# Altium PCB PCB1.PcbDoc
Units mil, origin at the board's own origin, x right, y up, seen from the top; angles counter-clockwise.
Board outline 4350 x 3850 mil, 2 copper layers (Top Layer, Bottom Layer); 44 components, 40 nets, 165 pads, 38 vias.
Unrouted connection lines stored in the file: 56.
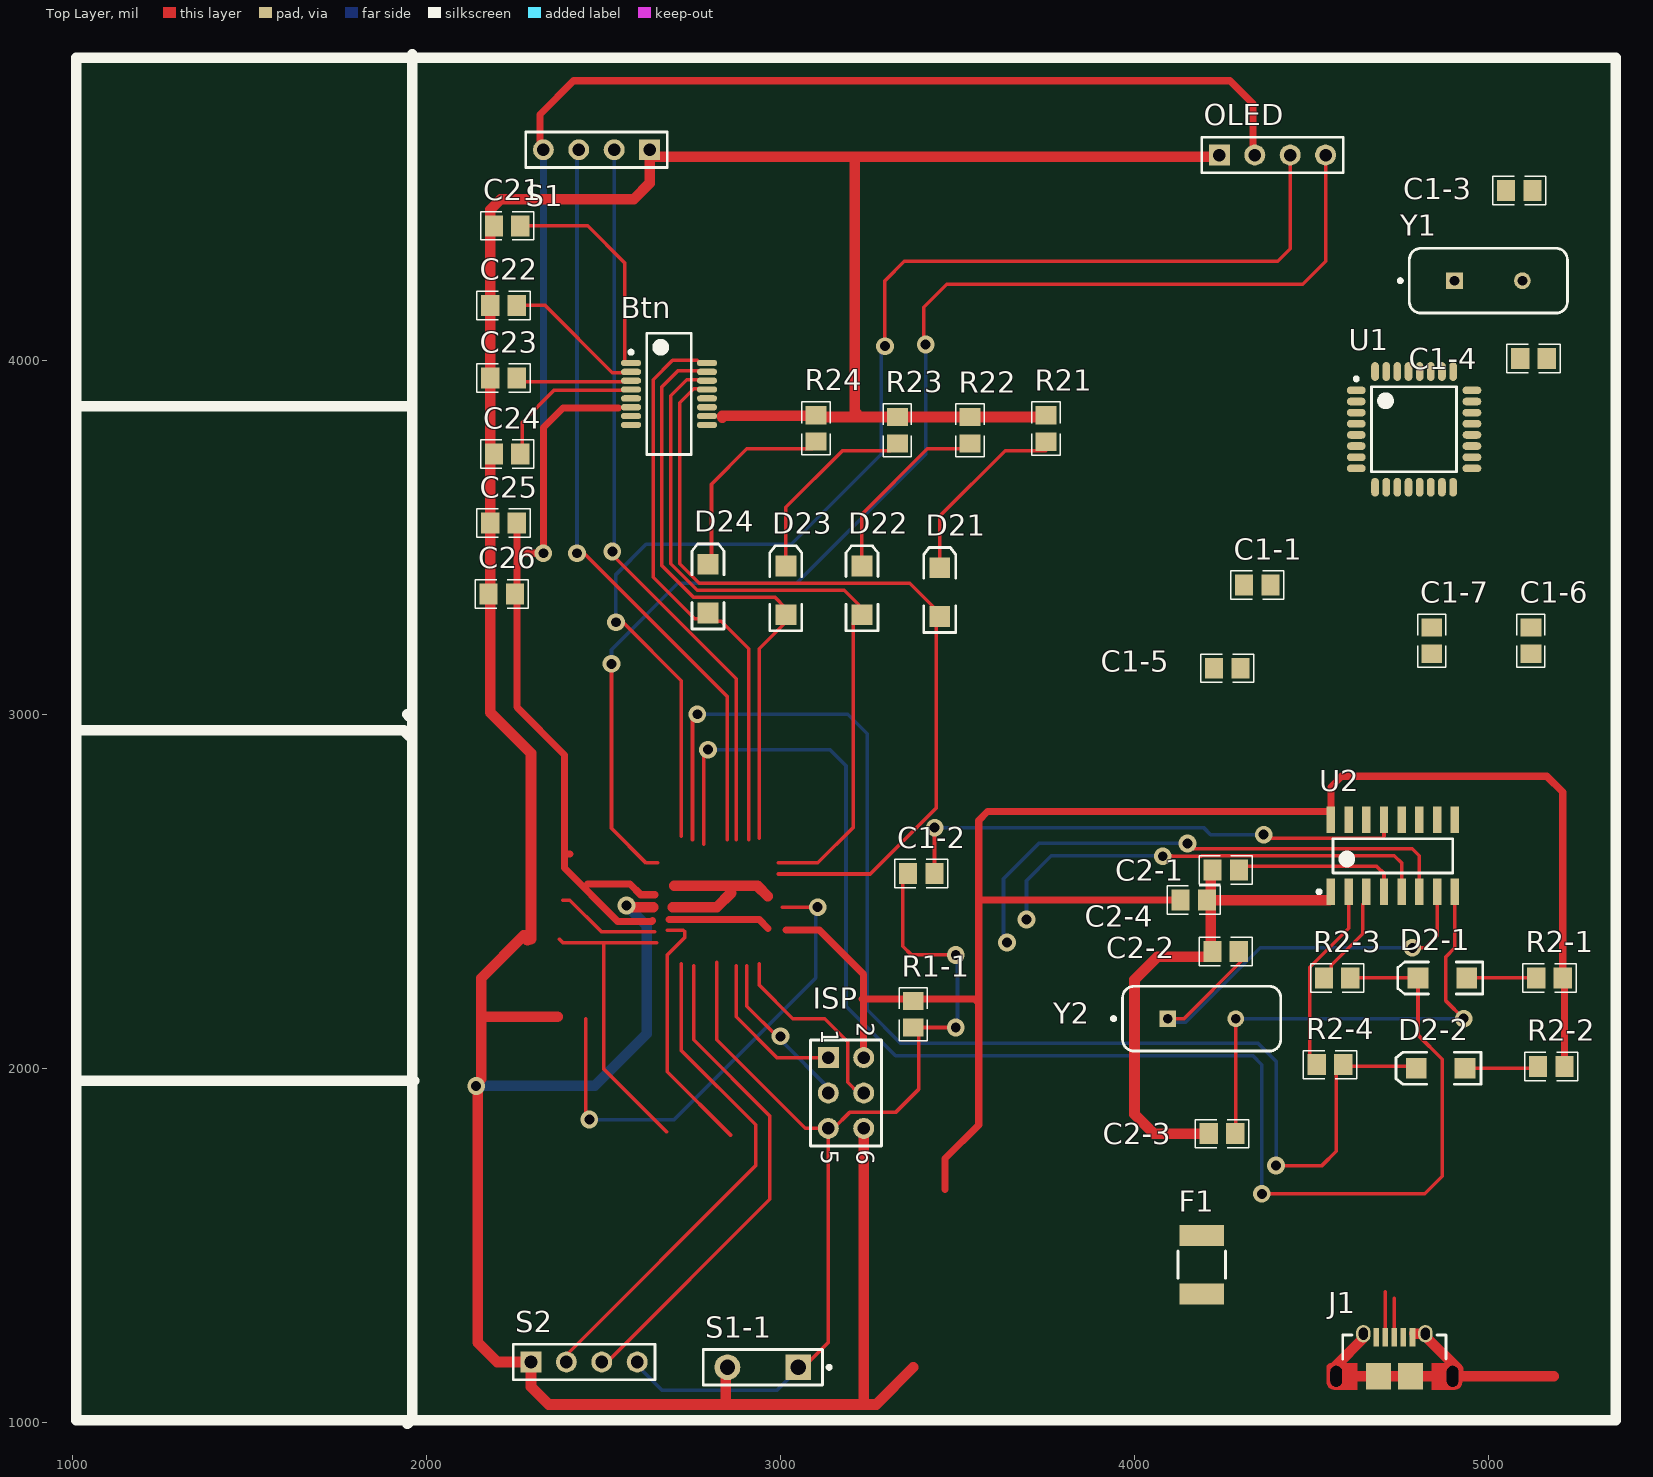
[diagram p0: Top Layer view]
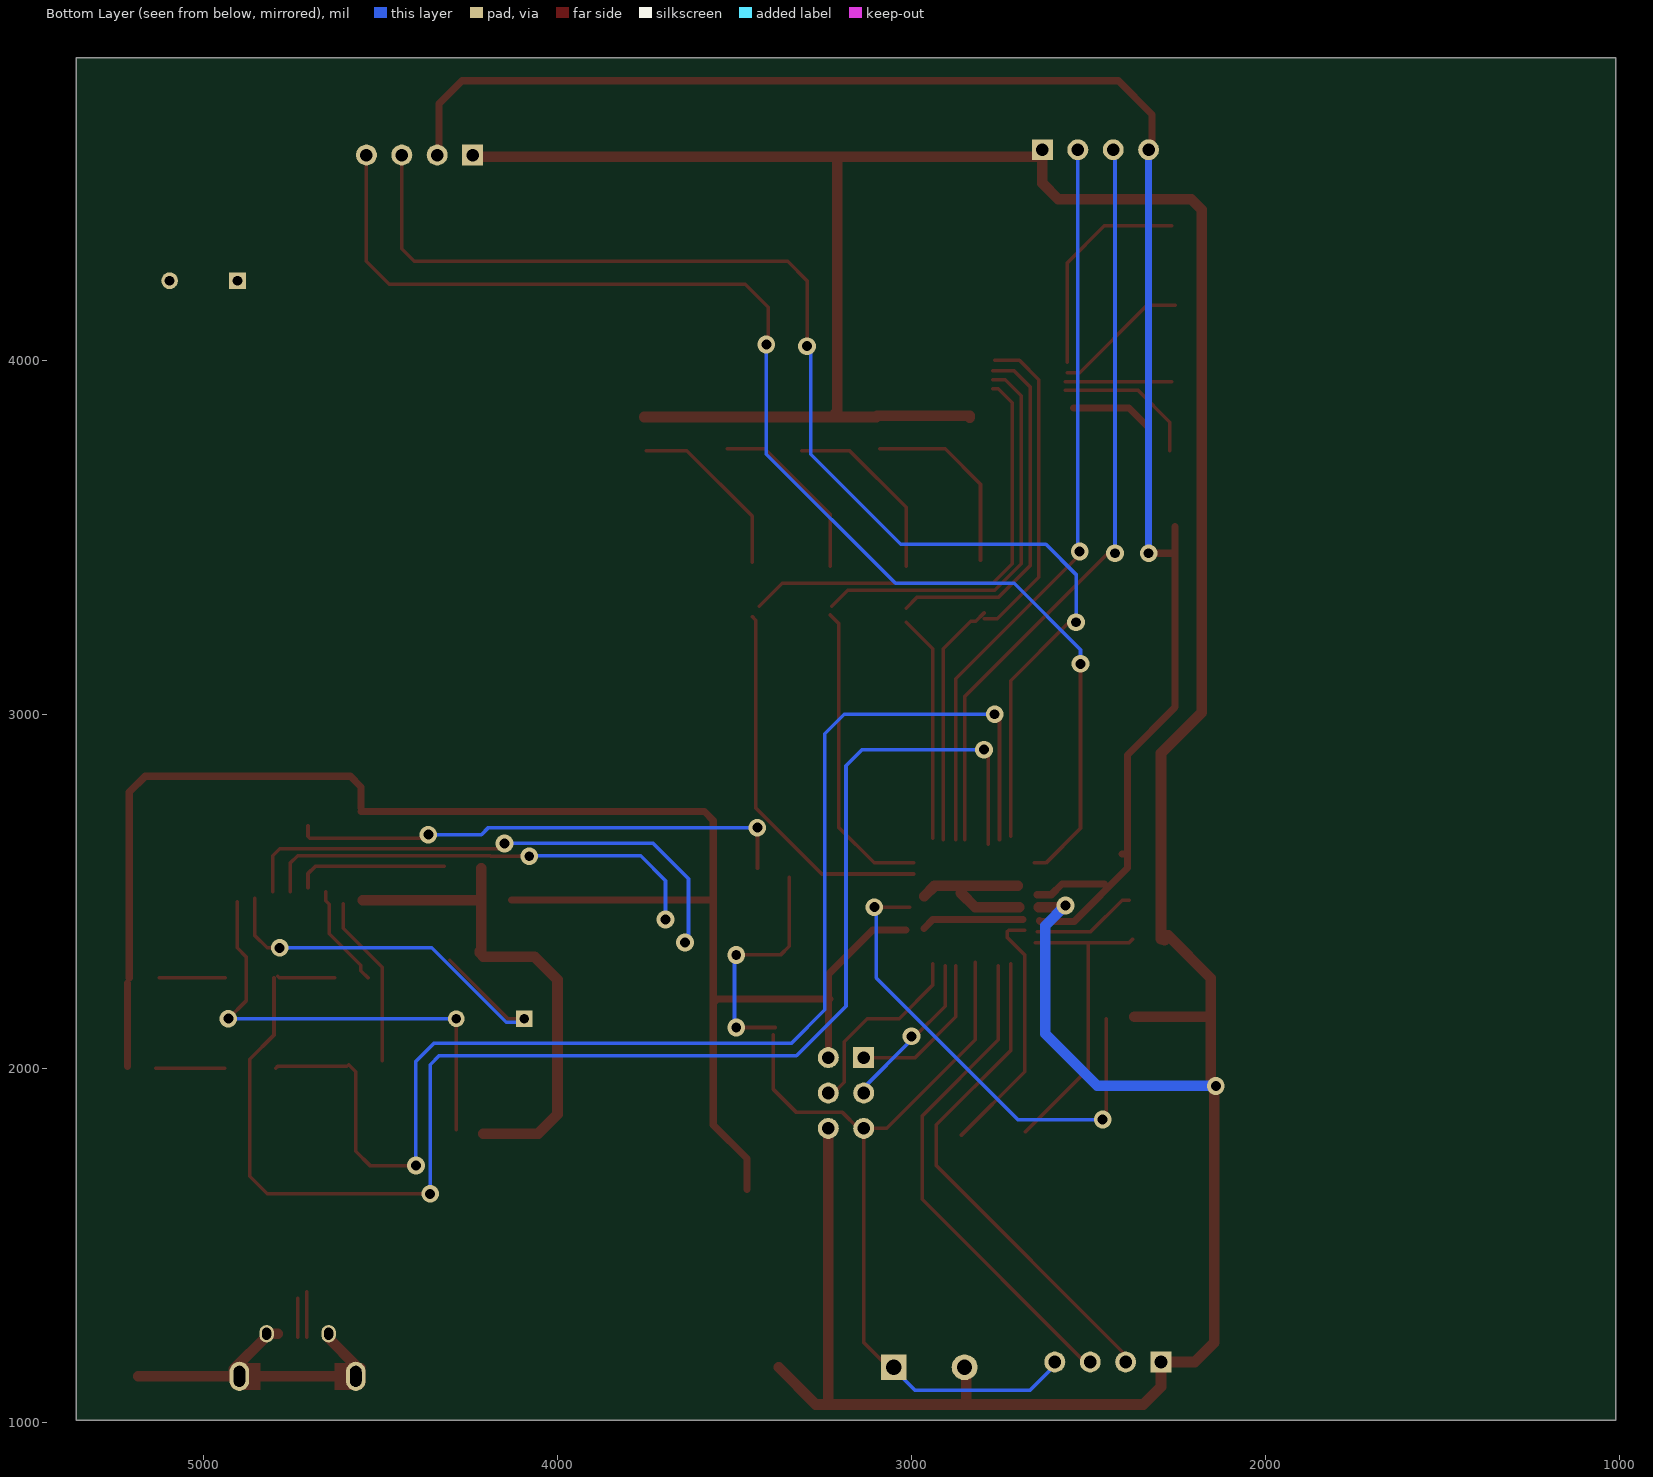
[diagram p1: Bottom Layer view, seen from below]

## Layer stack, top to bottom
Top Solder: solder mask 0.4, Solder Resist, Dk 3.5
Top Layer: signal copper 1.4
Dielectric 1: dielectric 12.6, FR-4, Dk 4.8
Bottom Layer: signal copper 1.4
Bottom Solder: solder mask 0.4, Solder Resist, Dk 3.5

## Board outline
1010,1005 1010,4855 5360,4855 5360,1005

## Design rules (kind name [scope] priority, off if disabled: settings)
Clearance [All] p1: gap=6 ignorepadtopadclearanceinfootprint=TRUE
PolygonConnect [All] p1: connectstyle=Relief reliefconductorwidth=10 reliefentries=4 polygonreliefangle="90 Angle" airgapwidth=10
RoutingVias [All] p1: holewidth=28 width=50 viastyle="Through Hole" minholewidth=28 minwidth=50 maxholewidth=28 maxwidth=50
SolderMaskExpansion [All] p1: expansion=4 istentingtop=FALSE
Width [All] p1: maxlimit=30 minlimit=10 preferedwidth=15
30 further rules are at their usual default settings.

## Classes and differential pairs
component class TTP224: Btn C21 C22 C23 C24 C25 C26 D21 D22 D23 D24 R21 R22 R23 R24
component class Sheet1: C1-1 C1-2 C1-3 C1-4 C1-5 C1-6 C1-7 C2-1 C2-2 C2-3 C2-4 D2-1 D2-2 F1 ISP J1 OLED R1-1 R2-1 R2-2 R2-3 R2-4 S1 S1-1 S2 U1 U2 Y1 Y2

## Components (designator, comment, footprint, x,y, rotation, side; value= is the part's Value field where it differs from the comment)
Btn "Btn" SOP64P600X175-16N 2685,3905 r0 top
C1-1 "CAP" 0805 3674.09,4169.84 r0 top value=22pF
C1-2 "CAP" 0805 4070.71,1745.16 r180 top value=22pF
C1-3 "CAP" 0805 5760.71,3675.16 r180 top value=22pF
C1-4 "CAP" 0805 5800.71,3200.16 r180 top value=22pF
C1-5 "CAP" 0805 3589.09,3934.84 r0 top value=22pF
C1-6 "CAP" 0805 4315,2535 r90 top value=22pF
C1-7 "CAP" 0805 4035,2535 r90 top value=22pF
C2-1 "CAP" 0805 3584.29,3364.84 r0 top value=22pF
C2-2 "CAP" 0805 3584.09,3134.84 r0 top value=22pF
C2-3 "CAP" 0805 3574.09,2619.84 r0 top value=22pF
C2-4 "CAP" 0805 3494.29,3279.84 r0 top value=0.1uF
C21 "CAP" 0805 1554.09,5184.84 r0 top value=30pF
C22 "CAP" 0805 1544.09,4959.84 r0 top value=30pF
C23 "CAP" 0805 1544.09,4754.84 r0 top value=30pF
C24 "CAP" 0805 1554.09,4539.84 r0 top value=30pF
C25 "CAP" 0805 1544.09,4344.84 r0 top value=30pF
C26 "CAP" 0805 1539.29,4144.84 r0 top value=30pF
D2-1 "LED2" 3.2X1.6X1.1 4870,2255 r180 top
D2-2 "LED2" 3.2X1.6X1.1 4865,2000 r180 top
D21 "LED2" 3.2X1.6X1.1 3450,3345 r90 top
D22 "LED2" 3.2X1.6X1.1 3230,3350 r90 top
D23 "LED2" 3.2X1.6X1.1 3015,3350 r90 top
D24 "LED2" 3.2X1.6X1.1 2795,3355 r90 top
F1 "MF-MSMF020-2" FP-MF-MSMF020-2-MFG 4190,1445 r270 top value=0.4-6Ω
ISP "Header 3X2" HDR2X3 3135,2030 r270 top
J1 "614105150621" 629105150921 4734.41,1129.57 r0 top
OLED "Header 4" HDR1X4 4240,4580 r0 top
R1-1 "RES" 0805 2570.16,1479.09 r90 top
R2-1 "RES" 0805 5845.91,1450.16 r180 top
R2-2 "RES" 0805 5850.71,1200.16 r180 top
R2-3 "RES" 0805 5245.71,1450.16 r180 top
R2-4 "RES" 0805 5225.71,1205.16 r180 top
R21 "RES" 0805 2945.16,3134.09 r90 top
R22 "RES" 0805 2730.16,3129.09 r90 top
R23 "RES" 0805 2525.16,3129.29 r90 top
R24 "RES" 0805 2295.16,3134.29 r90 top
S1 "Header 4" HDR1X4 2630,4595 r180 top
S1-1 "SW-PB" SPST-2 2950,1155 r180 top
S2 "Header 4" HDR1X4 2295,1170 r0 top
U1 "ATmega328P-AU" "32A_L - duplicate" 4790,3805 r0 top
U2 "CH340G" SOIC127P600X170-16N 4730,2600 r90 top
Y1 "FOXSLF/160-20" FOX-FOXSLF160-20 5000,4225 r0 top
Y2 "FOXSLF/160-20" FOX-FOXSLF160-20 4190,2140 r0 top

## Footprints (in the part's own frame and the unit in brackets; to place one, negate y for a bottom-side part, rotate by r counter-clockwise, add the part's x,y. Pads: shape width x height; smd on the part's side, far side on the other; paste and mask are expansions set on the pad)
3.2X1.6X1.1 [mm] "SMT LED; 2 Flat Leads"
  rect 1.5x1.5 smd: 1(-1.75,0) 2(1.75,0)
  silkscreen extent -2.9,-1.15 3.2,1.15
"32A_L - duplicate" [mm] "Thin QFP, 32-Leads, Body 7x7mm, Pitch 0.8mm, IPC High Density"
  oval 1.35x0.55 smd: 1(-4.15,2.8) 2(-4.15,2) 3(-4.15,1.2) 4(-4.15,0.4) 5(-4.15,-0.4) 6(-4.15,-1.2) 7(-4.15,-2) 8(-4.15,-2.8) 17(4.15,-2.8) 18(4.15,-2) 19(4.15,-1.2) 20(4.15,-0.4) 21(4.15,0.4) 22(4.15,1.2) 23(4.15,2) 24(4.15,2.8)
  oval 0.55x1.35 smd: 9(-2.8,-4.15) 10(-2,-4.15) 11(-1.2,-4.15) 12(-0.4,-4.15) 13(0.4,-4.15) 14(1.2,-4.15) 15(2,-4.15) 16(2.8,-4.15) 25(2.8,4.15) 26(2,4.15) 27(1.2,4.15) 28(0.4,4.15) 29(-0.4,4.15) 30(-1.2,4.15) 31(-2,4.15) 32(-2.8,4.15)
  silkscreen extent -4.27,-3.05 3.05,3.75, body extent -3.5,-3.5 3.5,3.5, height 1.2
0805 [mm]
  rect 1.3x1.5 smd: 1(16.152,-20.443) 2(18.052,-20.443)
  silkscreen extent 15.2,-21.46 19.01,-19.43, body extent 15.96,-20.95 18.25,-19.93, height 1
629105150921 [mm] "Micro USB 2.0 Type AB Horizontal"
  rect 0.4x1.35 smd: 1(-1.3,2.805) 2(-0.65,2.805) 3(0,2.805) 4(0.65,2.805) 5(1.3,2.805)
  round 0 / inner oval 1.4x2.1 / far side oval 1.4x2.1 hole 0.825 slot 1.5 at 90 deg mask+0.102: Shell(-4.175,0)
  oval 1.05x1.25 hole 0.65 slot 0.85 at 90 deg: Shell(-2.225,3.055) Shell(2.225,3.055)
  rect 1.8x1.9 smd: Shell(-1.15,0) Shell(1.15,0)
  round 0 / inner round 0 / far side oval 1.4x2.1 hole 0.825 slot 1.5 at 90 deg mask+0.102: Shell(4.175,0)
  Top Layer region: -4.353,-0.95 -4.544,-0.912 -4.706,-0.804 -4.814,-0.641 -4.852,-0.45 -4.852,-0.45 -4.852,0.65 -4.83,0.765 -4.765,0.862 -4.667,0.927 -4.553,0.95 -4.553,0.95 -2.668,0.95 -2.668,-0.95
  Top Layer region: 4.353,-0.95 4.544,-0.912 4.706,-0.804 4.814,-0.641 4.852,-0.45 4.852,-0.45 4.852,0.65 4.83,0.765 4.765,0.862 4.667,0.927 4.553,0.95 4.553,0.95 2.668,0.95 2.668,-0.95
  silkscreen extent -3.7,1.25 3.7,2.97, body extent -4.3,-2.64 4.3,3.23, height 2.76
FOX-FOXSLF160-20 [mm] "THD, 2-Leads, Body 11.35x4.65mm"
  rect 1.2x1.2 hole 0.7: 1(-2.44,0)
  round 1.2 hole 0.7: 2(2.44,0)
  silkscreen extent -6.45,-2.32 5.68,2.32, body extent -5.67,-2.32 5.68,2.33, height 3.6
FP-MF-MSMF020-2-MFG [mm]
  rect 1.5x3.2 smd paste+0 mask+0: 1(-2.1,0) 2(2.1,0)
  silkscreen extent -0.97,-1.71 0.97,1.71, body extent -2.95,-1.81 2.95,1.81, height 0.25
HDR1X4 [mm] "Connector; Header; 4 Position"
  rect 1.5x1.5 hole 0.9: 1(0,0)
  round 1.5 hole 0.9: 2(2.54,0) 3(5.08,0) 4(7.62,0)
  silkscreen extent -1.27,-1.27 8.89,1.27
HDR2X3 [mm] "Connector; Header; 3x2 Position"
  rect 1.5x1.5 hole 0.9: 1(0,0)
  round 1.5 hole 0.9: 2(0,2.54) 3(2.54,0) 4(2.54,2.54) 5(5.08,0) 6(5.08,2.54)
  silkscreen extent -1.27,-1.27 6.35,3.81
SOIC127P600X170-16N [mm] "SOIC, 16-Leads, Body 8.6x4.0mm (max), Pitch 1.27mm, IPC Medium Density"
  rect 1.9x0.6 smd: 1(-2.575,4.445) 2(-2.575,3.175) 3(-2.575,1.905) 4(-2.575,0.635) 5(-2.575,-0.635) 6(-2.575,-1.905) 7(-2.575,-3.175) 8(-2.575,-4.445) 9(2.575,-4.445) 10(2.575,-3.175) 11(2.575,-1.905) 12(2.575,-0.635) 13(2.575,0.635) 14(2.575,1.905) 15(2.575,3.175) 16(2.575,4.445)
  silkscreen extent -2.7,-4.3 1.22,5.42, body extent -1.98,-4.28 1.97,4.28, height 1.7
SOP64P600X175-16N [mm] "SOP, 16-Leads, Body 8.65x3.90mm, Pitch 0.64mm, IPC Medium Density"
  oval 1.45x0.45 smd: 1(-2.725,2.222) 2(-2.725,1.587) 3(-2.725,0.953) 4(-2.725,0.318) 5(-2.725,-0.318) 6(-2.725,-0.953) 7(-2.725,-1.587) 8(-2.725,-2.222) 9(2.725,-2.222) 10(2.725,-1.587) 11(2.725,-0.953) 12(2.725,-0.318) 13(2.725,0.318) 14(2.725,0.953) 15(2.725,1.587) 16(2.725,2.222)
  silkscreen extent -2.85,-4.35 1.6,4.35, body extent -2,-4.35 2,4.35, height 1.75
SPST-2 [mm] "Switch; 2 Leads"
  rect 1.85x1.85 hole 1.1: 1(-2.54,0)
  round 1.85 hole 1.1: 2(2.54,0)
  silkscreen extent -4.89,-1.27 4.28,1.27

## Part data
C1-1 C1-2 C1-3 C1-4 C1-5 C1-6 C1-7 C2-1 C2-2 C2-3 C2-4 C21 C22 C23 C24 C25 C26: "Capacitor"
D2-1 D2-2 D21 D22 D23 D24: "Typical RED, GREEN, YELLOW, AMBER GaAs LED", LatestRevisionDate=17-Jul-2002, LatestRevisionNote="Re-released for DXP Platform.", PackageDescription="SM LED; 2 Flat Leads", PackageReference=3.2X1.6X1.1, PackageVersion=Feb-2002, Published=8-Jun-2000, Publisher="Altium Limited"
F1: library part CMP-07400-000027-1, "PTC RESET FUSE 30V 200MA 1812", Current Rating=80A, Hold Current=0.2A, Manufacturer=Bourns, Resistance=0.4-6Ω, Temperature="-40°C to +85°C", Temperature Range High=+85°C, Temperature Range Low=-40°C, Trip Current=0.4A, Voltage Rating=30V, Automotive=Yes, Automotive Grade="Grade 3", Category=Fuse, ComponentLink2Description=Datasheet, ComponentLink2URL=https://www.bourns.com/docs/Product-Datasheets/mfmsmf.pdf, Device Class L1="Circuit Protection", Device Class L2="PTC Resettable Fuses", Device Class L3=unset, Digikey Description="PTC RESET FUSE 30V 200MA 1812", Height=1.1mm, Lead Free=Yes, Manufacturer Part Number=MF-MSMF020-2, Mouser Description="Resettable Fuses - PPTC 0.2A 30V 0.40ohm", Octopart=https://octopart.com/mf-msmf020-2-bourns-19289, Package=MF-MSMF020-2, RoHS=TRUE, Trip Time=0.06s
ISP: "Header, 3-Pin, Dual row", LatestRevisionDate=17-Jul-2002, LatestRevisionNote="Re-released for DXP Platform.", Publisher="Altium Limited"
J1: library part CMP-1502-03251-1, "Micro USB 2.0 Type AB Receptacle WR-COM, Vertical, THT", Contact Resistance=30mOhm, Manufacturer="Wurth Elektronik", Operating Temperature=-40to85degC, Rated Current=1.8A, Working Voltage=30VAC, Connector Type=MicroUSB2.0TypeAB, Datasheet URL=https://katalog.we-online.de/em/datasheet/614105150621.pdf, Gender=Receptacle, Manufacturer URL=http://www.we-online.de, Mounting Technology=THT, Orientation=Vertical, Package Reference=614105150621, Packaging=TapeandReel, Part Number=614105150621, Publisher=WurthElektronik
OLED S1 S2: "Header, 4-Pin", LatestRevisionDate=17-Jul-2002, LatestRevisionNote="Re-released for DXP Platform.", Publisher="Altium Limited"
R1-1 R2-1 R2-2 R2-3 R2-4 R21 R22 R23 R24: "Resistor", Vaule=1K
S1-1: "Switch", LatestRevisionDate=17-Jul-2002, LatestRevisionNote="Re-released for DXP Platform.", PackageDescription="Switch; 2 Leads", PackageReference=SPST-2, Published=24-Mar-1999, Publisher="Altium Limited"
U1: library part CMP-0095-00269-2, "8-bit AVR Microcontroller, 32KB Flash, 1KB EEPROM, 2KB SRAM, 32-pin TQFP, Industrial Grade (-40°C to 85°C)", Code_JEDEC=MS-026-ABA, ComponentLink1Description="Manufacturer URL", ComponentLink1URL=http://www.atmel.com/, ComponentLink2Description="ATmega48A/48PA/88A/88PA/168A/168PA/328/328P Datasheet", ComponentLink2URL=http://www.atmel.com/dyn/resources/prod_documents/doc8271.pdf, ComponentLink3Description="ATmega48A/48PA/88A/88PA/168A/168PA/328/328P Summary", ComponentLink3URL=http://www.atmel.com/dyn/resources/prod_documents/8271S.pdf, DatasheetVersion="revD, May-2011", PackageDescription="32-Lead, 7x7x1.0 mm Body, 0.8mm Lead Pitch, Thin Profile Plastic Quad Flat Package (TQFP)", PackageReference=32A, PackageVersion="revC, Oct-2010", RevisionNote="DatasheetVersion & PackageVersion updated. URLs added."
Y1 Y2: library part CMP-1749-00003-1, "Resistance Weld Thru-Hole Crystal, 16 MHz, -20 to 70 degC, 2-Pin THD, RoHS, Bulk", Case\Package=Axial, Max Operating Temperature="155 degC", Min Operating Temperature="-55 degC", Package Quantity=200, Power Rating="250 mW", Resistance="221 kohm", Tolerance=1%, Voltage Rating="250 V", ComponentLink1Description="Manufacturer URL", ComponentLink1URL=http://www.foxonline.com/, ComponentLink2Description=Datasheet, ComponentLink2URL=http://www.foxonline.com/pdfs/hc49slf.pdf, DatasheetVersion=Mar-15, Length="0.248 inch", Mount="Through Hole", PackageDescription="2-Pin Through Hole Device, Body 11.35 x 4.65 mm", PackageReference=FOXSLF160-20, Packaging=Bulk, RoHSCompliant=true

## Via types
v1: diameter 50, hole 28, Top Layer to Bottom Layer, 38 vias

## Nets (pads, with @x,y where several pads share a name; then routed paths per layer and width w, separated by ;. In a path a pad name is that pad's centre, name@x,y a point inside that pad or via, vN(x,y) a via of type N, cw(c..) or ccw(c..) an arc to the next point about the centre after c; other vN are vias at no path point)
AREF: C1-1.2 U1.20 | length 1384.8
  Top Layer w10: 2450,2140 2450,1865 v1(2460,1855) ; 3005,2455 v1(3105,2455)
  Bottom Layer w10: v1(2460,1855) 2700,1855 3100,2255 v1@3100,2445
  other v1: 2460,1855
D+: J1.3 U2.5 | length 1374.2
  Top Layer w10: 4105.51,2600 4106.51,2599 4188.52,2599 4190.05,2600.53 4734.47,2600.53 4755,2580 U2.5 ; J1.3 4734.41,1349.41
  Bottom Layer w10: v1(3695,2420) 3695,2530 3765,2600 4079,2600 v1(4080,2599)
D-: J1.2 U2.6 | length 1645.3
  Top Layer w10: v1(4150,2635) 4165,2620 4785,2620 4805,2600 U2.6 ; J1.2 4708.82,1368.82
  Bottom Layer w10: v1(3640,2355) 3630,2365 3630,2535 3730,2635 v1(4150,2635)
  other v1: 3640,2355 4150,2635
DTR: C1-2.1 U2.13 | length 1414.8
  Top Layer w10: C1-2.1@3435,2565 3435,2679.09 v1(3435.46,2679.54) ; v1@4375,2650 4700,2650 4705,2655 U2.13@4705,2685
  Bottom Layer w10: v1(3435.46,2679.54) 3435.91,2680 4195,2680 4215,2660 v1(4365,2660)
  other v1: 3435.46,2679.54
Echo: S1.2 U1.27 | length 2065
  Top Layer w10: v1@2530,3445 2875,3100 2875,3095 2875,2645
  Bottom Layer w10: v1@2525,3475 2530,3480 S1.2
  other v1: 2525,3460 2525,3460
Echo2: S2.2 U1.9 | length 1420.7
  Top Layer w10: S2.2@2390,1185 2930,1725 2930,1840 2720,2050 2720,2295
GND: Btn.10 C1-1.1 C1-3.2 C1-4.2 C1-5.1 C1-6.1 C1-7.1 C2-1.1 C2-2.1 C2-3.1 C2-4.2 C21.1 C22.1 C23.1 C24.1 C25.1 C26.1 ISP.6 J1.5 J1.Shell OLED.1 R21.2 R22.2 R23.2 R24.2 S1-1.2 S1.1 S2.1 U1.3 U1.5 U1.21 U2.1 | length 13427.7
  Top Layer w30: v1(2140,1950) 2140,1955.41 2154.32,1969.73 2154.32,2145 ; v1@2145,1950 2145,1225 2200,1170 S2.1 2295,1100 2345,1050 2845,1050 ; 2180,4070 C22.1@2180,4170 ; 2180,4080 2180,3680 C25.1 2180,3340 2180,3005 2295,2890 2295,2480 2295,2365 ; C22.1 2180,4425 2210,4455 2585,4455 2630,4500 S1.1 2650,4575 OLED.1@4230,4575 ; 2275,2375 2154.32,2254.32 2154.32,2145 ; 2285.2,2361.06 2285.2,2365 ; 2370,2145 2154.32,2145 ; v1@2580,2455 2640,2455 ; 2695,2455 2820,2455 2860,2495 ; 2700,2515 2934.87,2515 2964.12,2485.75 ; 2835,3838.44 2835,3843.44 3096.37,3843.44 3100,3839.8 R22.2 R21.2@3754.8,3839.8 ; S1-1.2@2845,1150 2845,1050 ; 3210,4570 3210,3855 3215,3850 ; ISP.6 3235,1055 3230,1050 ; 3375,1155 3270,1050 3230,1050 ; C2-3.1 4055,1815 4000,1870 4000,2250 4065,2315 4191.84,2315 4192.31,2315.47 4209.41,2315.47 4220,2326.06 C2-2.1 ; C2-2.1@4215,2335 4215,2475 C2-1.1@4215,2565 ; C2-4.2@4220,2475 U2.1@4550,2475 ; 4570,1160 4646.81,1236.81 J1.Shell@4646.81,1249.84 ; 4585,1130 5185,1130 ; J1.5@4790,1250 4821.85,1250 4822.01,1249.84 4822.01,1242.99 4915,1150 ; 2845,1050 3230,1050
  Bottom Layer w30: v1(2140,1950) 2475,1950 2622.11,2097.11 2622.11,2402.89 v1(2565,2460)
Key1: Btn.1 C21.2 | length 618.7
  Top Layer w10: C21.2 2455,4380 2560,4275 Btn.1@2560,3995
Key2: Btn.2 C22.2 | length 383.9
  Top Layer w10: C22.2 2335,4155 2525,3965 Btn.2@2560,3965
Key3: Btn.3 C23.2 | length 300
  Top Layer w10: C23.2@2265,3940 Btn.3@2565,3940
Key4: Btn.4 C24.2 | length 412.3
  Top Layer w10: C24.2@2270,3745 2270,3825 2360,3915 Btn.4@2565,3915
MISO: ISP.1 U1.14 | length 452.6
  Top Layer w10: 2875,2290 2875,2145 2990,2030 ISP.1
MOSI: ISP.4 U1.16 | length 533.7
  Top Layer w10: 2940,2295 2940,2235 3035,2140 3057.5,2140 3102.5,2140 3125,2140 3190,2075 3190,1960 ISP.4@3220,1930
NetC1-3_1: C1-3.1 U1.7 Y1.2 | length 1019.6
  Top Layer w10: 2385,2475 2405,2475 2495,2385 2645,2385 ; 2680,2390 2725,2390 2730,2385 2730,2370 2680,2320 2680,1990 2860,1810
NetC1-4_1: C1-4.1 U1.8 Y1.1 | length 888.3
  Top Layer w10: 2375,2365 2385,2355 2650,2355 ; 2500,2355 2500,1998.94 2678.94,1820
NetC2-1_2: C2-1.2 U2.4 | length 433.3
  Top Layer w10: C2-1.2@4320,2570 4685,2570 4705,2550 U2.4@4705,2510
NetC2-2_2: C2-2.2 U2.7 Y2.1 | length 1241.1
  Top Layer w10: Y2.1 4140,2140 C2-2.2@4305,2305 ; v1@4795,2340 4820,2340 4855,2375 U2.7@4855,2480
  Bottom Layer w10: Y2.1 4103.94,2130 4145,2130 4355,2340 v1(4785,2340)
  other v1: 4785,2340
NetC2-3_2: C2-3.2 U2.8 Y2.2 | length 1318.9
  Top Layer w10: C2-3.2@4286.06,1826.06 Y2.2 ; U2.8@4905,2470 4905,2340 4880,2315 4880,2190 v1(4930,2140)
  Bottom Layer w10: Y2.2 v1(4930,2140)
  other v1: 4930,2140
NetD2-1_1: D2-1.1 R2-1.2 | length 186.3
  Top Layer w10: D2-1.1 R2-1.2@5125.2,2255
NetD2-2_1: D2-2.1 R2-2.2 | length 195
  Top Layer w10: D2-2.1@4940,2000 R2-2.2@5135,2000
NetD21_2: D21.2 R21.1 | length 506.6
  Top Layer w10: D21.2@3450,3430 3450,3560 3635,3745 R21.1@3750,3745
NetD22_2: D22.2 R22.1 | length 512.7
  Top Layer w10: D22.2 3230,3565 3415,3750 R22.1@3520,3750
NetD23_2: D23.2 R23.1 | length 527.4
  Top Layer w10: D23.2 3015,3585 3175,3745 R23.1@3310,3745
NetD24_2: D24.2 R24.1 | length 541.4
  Top Layer w10: D24.2@2805,3435 2805,3650 2905,3750 R24.1@3090,3750
NetF1_2: F1.2 J1.1
NetR2-3_2: R2-3.2 U2.2 | length 782.7
  Top Layer w10: 4495,2021.21 4495,2285 4605,2395 U2.2@4605,2465 ; R2-3.2 4555.59,2275.59 4555.59,2290.59 4645,2380 4645,2463.03 4655,2473.03 4655,2498.62
NetR2-4_2: R2-4.2 U2.3
OUT1: Btn.16 D21.1 U1.23 | length 2360.3
  Top Layer w10: 2770,3920 2755,3920 2715,3880 2715,3425 2770,3370 3365,3370 D21.1@3430,3305 ; 2993.39,2548.74 3253.74,2548.74 3440,2735 3440,3266.1 D21.1
OUT2: Btn.15 D22.1 U1.24 | length 2022.7
  Top Layer w10: 2770,3945 2735,3945 2690,3900 2690,3425 2765,3350 3180,3350 D22.1@3225,3305 ; 2993.39,2580.24 3105.24,2580.24 3205,2680 3205,3250.72 3205.47,3251.19 3205.47,3256.57 D22.1
OUT3: Btn.14 D23.1 U1.25 | length 1669.4
  Top Layer w10: 2770,3970 2710,3970 2665,3925 2665,3420 2755,3330 2985,3330 D23.1@3015,3300 ; 2940,2650 2940,3185 D23.1@3015,3260
OUT4: Btn.13 D24.1 U1.26 | length 1605.8
  Top Layer w10: 2765,4000 2695,4000 2640,3945 2640,3387.63 2757.63,3270 D24.1@2795,3270 ; D24.1 2818.19,3262.92 2832.08,3262.92 2910,3185 2910,2645
RST: Btn.6 C1-2.2 C2-4.1 C25.2 C26.2 F1.1 ISP.2 ISP.5 OLED.2 R1-1.1 R1-1.2 R2-1.1 R2-2.1 S1-1.1 S1.4 S2.4 U1.29 U2.16 | length 13912.4
  Top Layer w10: 2820,2300 2820,2080 3070,1830 ISP.5 ; S1-1.1@3065,1155 3135,1225 ISP.5 ; C1-2.2@3345,2540 3345,2345 3370,2320 v1(3495,2320) ; R1-1.1@3385,2115 v1(3495,2115) ; R1-1.1@3390,2095 3390,1940 3325,1875 3195,1875 3150,1830 ISP.5
  Top Layer w20: C25.2@2255,3530 2255,3455 2255,3340 2255,3020 2389.8,2885.2 2389.8,2615 2389.8,2565.2 2540,2415 2636.67,2415 2638.33,2416.67 ; 2265,3455 v1(2330,3455) ; S1.4@2320,4605 2320,4695 2415,4790 4270,4790 4335,4725 OLED.2@4335,4595 ; v1@2330,3465 2330,3810 2385,3865 2541.95,3865 ; 2389.8,2605 2405,2605 ; 2455,2520 2575,2520 2605,2490 2645,2490 ; 2685,2420 2940,2420 2965,2395 ; 3015,2390 3110,2390 3235,2265 3235,2195 ISP.2 ; 3230,2195 3375,2195 3550,2195 3560,2185 ; 3465,1657.68 3465,1745 3560,1840 3560,2185 ; C2-4.1 3560,2475 ; U2.16@4555,2725 3845,2725 3585,2725 3560,2700 3560,2475 ; U2.16@4555,2735 4555,2795 4585,2825 5165,2825 5210,2780 R2-1.1 ; R2-2.1@5215,2005.2 R2-1.1@5215,2240 ; 3560,2185 3560,2195 3560,2475
  Bottom Layer w10: S2.4@2595,1160 2665,1090 2990,1090 3050,1150 S1-1.1 ; v1@3500,2125 v1@3500,2330
  Bottom Layer w20: v1(2330,3455) S1.4
  other v1: 2330,3455
RXD: D2-1.2 R2-3.1 U1.30 | length 4245
  Top Layer w10: 2782.76,2633.39 2782.76,2887.76 v1(2795,2900) ; v1@4375,1645 4820,1645 4870,1695 4870,2025 4801.1,2093.9 D2-1.2 ; R2-3.1@4630,2255 4785,2255 D2-1.2@4790,2260
  Bottom Layer w10: v1@2785,2900 v1(2795,2900) 3140,2900 3185,2855 3185,2175 3325,2035 4335,2035 4360,2010 v1(4360,1645)
  other v1: 4360,1645
SCK: ISP.3 U1.15 | length 443.2
  Top Layer w10: 2905,2290 2905,2175 v1@2990,2090
  Bottom Layer w10: v1(3000,2090) 3000,2080 ISP.3@3140,1940
  other v1: 3000,2090
SCL: OLED.3 U1.32 | length 3646.5
  Top Layer w10: v1(2535,3260) 2555,3260 2720,3095 2720,2655 ; v1(3295,4040) 3295,4225 3350,4280 4405,4280 4440,4315 OLED.3
  Bottom Layer w10: v1(2535,3260) 2535,3395 2620,3480 3030,3480 3285,3735 v1@3285,4030
  other v1: 2535,3260
SDA: OLED.4 U1.1 | length 3681.1
  Top Layer w10: v1(2522.5,3142.5) 2522.5,2677.5 2620,2580 2653,2580 ; v1@3405,4060 3405,4150 3470,4215 4475,4215 4540,4280 OLED.4
  Bottom Layer w10: v1(2522.5,3142.5) 2522.5,3182.5 2710,3370 3045,3370 3410,3735 v1(3410,4045)
Trigger: S1.3 U1.28 | length 2090.7
  Top Layer w10: 2450,3450 2850,3050 2850,2645
  Bottom Layer w10: v1@2425,3470 S1.3@2425,4590
  other v1: 2425,3455
Trigger2: S2.3 U1.10 | length 1385.5
  Top Layer w10: S2.3@2520,1180 2970,1630 2970,1865 2755,2080 2755,2290
TXD: D2-2.2 R2-4.1 U1.31 | length 3787
  Top Layer w10: 2750,2645 2751.26,2646.26 2751.26,2986.26 v1(2765,3000) ; v1(4400,1725) 4530,1725 4570,1765 4570,1990.2 R2-4.1 ; R2-4.1@4595,2005 4791.1,2005 D2-2.2
  Bottom Layer w10: v1@2775,3000 3190,3000 3245,2945 3245,2165 3340,2070 4350,2070 4400,2020 v1(4400,1725)
  other v1: 4400,1725
VCC: C1-5.2 C1-6.2 C1-7.2 U1.4 U1.6 U1.18
pads on no net: Btn.5 Btn.7 Btn.8 Btn.9 Btn.11 Btn.12 J1.4 U1.2 U1.11 U1.12 U1.13 U1.17 U1.19 U1.22 U2.9 U2.10 U2.11 U2.12 U2.14 U2.15

## Silkscreen, mask and mechanical layers (free items; w line width, h text height)
Top Overlay:
  lines w30: 1020,1965 1965,1965 ; 1020,3870 1950,3870 1955,3865 ; 1030,2955 1935,2955 1950,2940 ; 1945,995 1960,1010 1960,4865 ; 1945,3000 1950,2995 ; 1010,1005 5360,1005 5360,4855 1010,4855 1010,1005

## Text inside footprints (layer, text, board x,y; h text height)
ISP: Top Overlay "6" at 3215,1770 h50 r270; Top Overlay "5" at 3115,1770 h50 r270; Top Overlay "2" at 3215,2130 h50 r270; Top Overlay "1" at 3115,2110 h50 r270
J1: Mechanical 2 "PCB Edge" at 4691.1,1050.83 h16